# Altium PCB DCDC_4812.PcbDoc
Units mil, origin at the board's own origin, x right, y up, seen from the top; angles counter-clockwise.
Board outline 3000 x 4250 mil, 2 copper layers (Top Layer, Bottom Layer), stack 70.024 mil thick; 46 components, 13 nets, 167 pads, 9 vias.
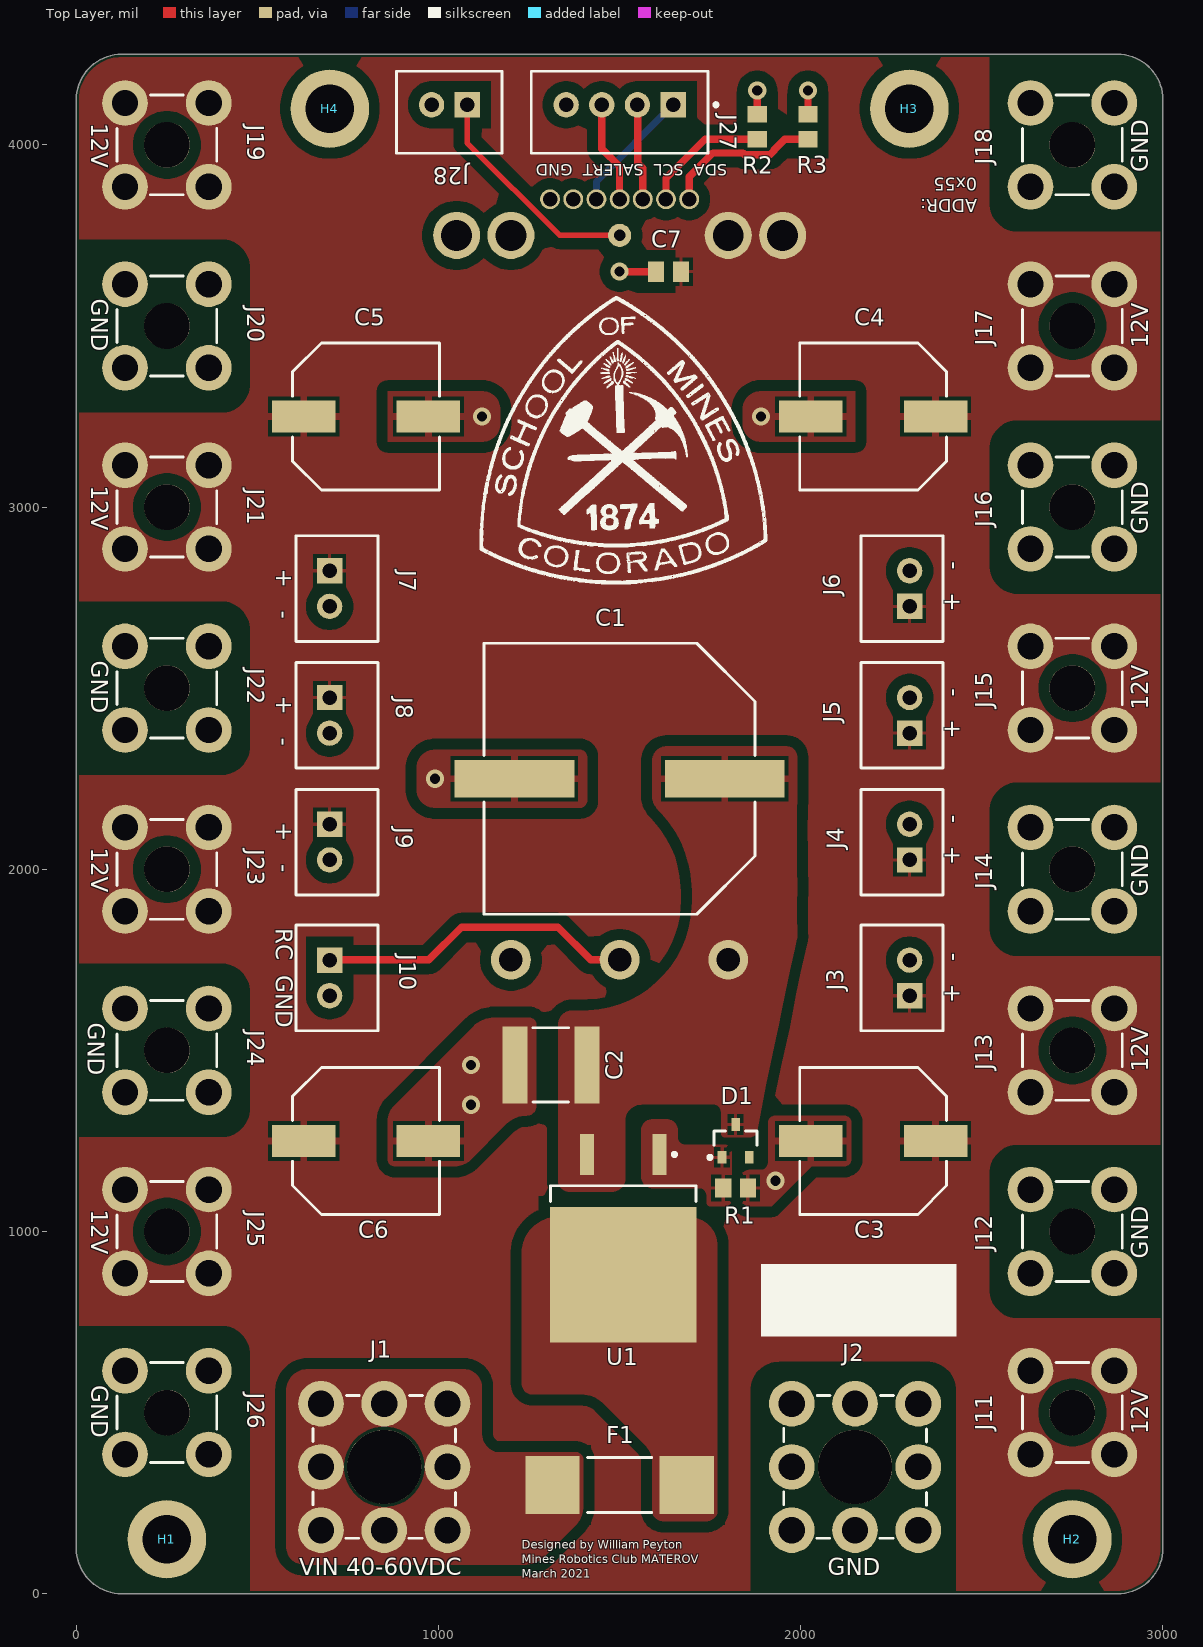
[diagram p0: Top Layer view]
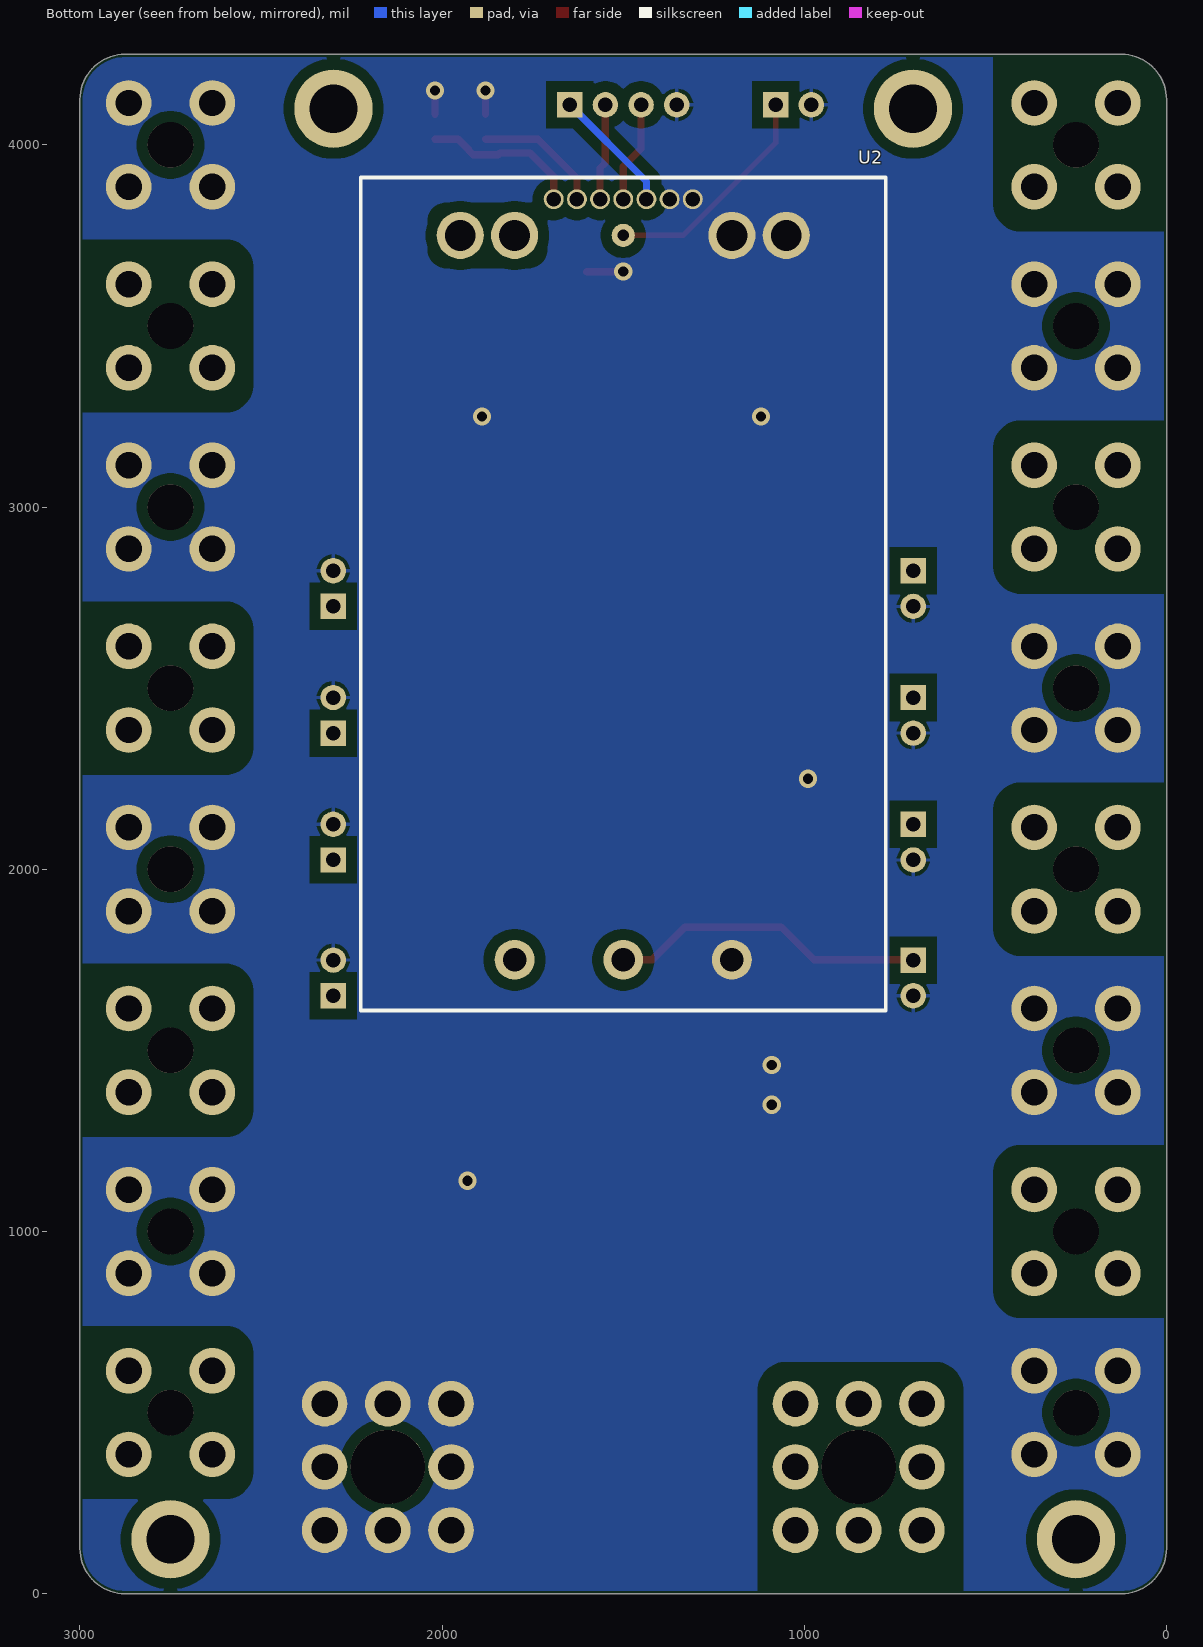
[diagram p1: Bottom Layer view, seen from below]
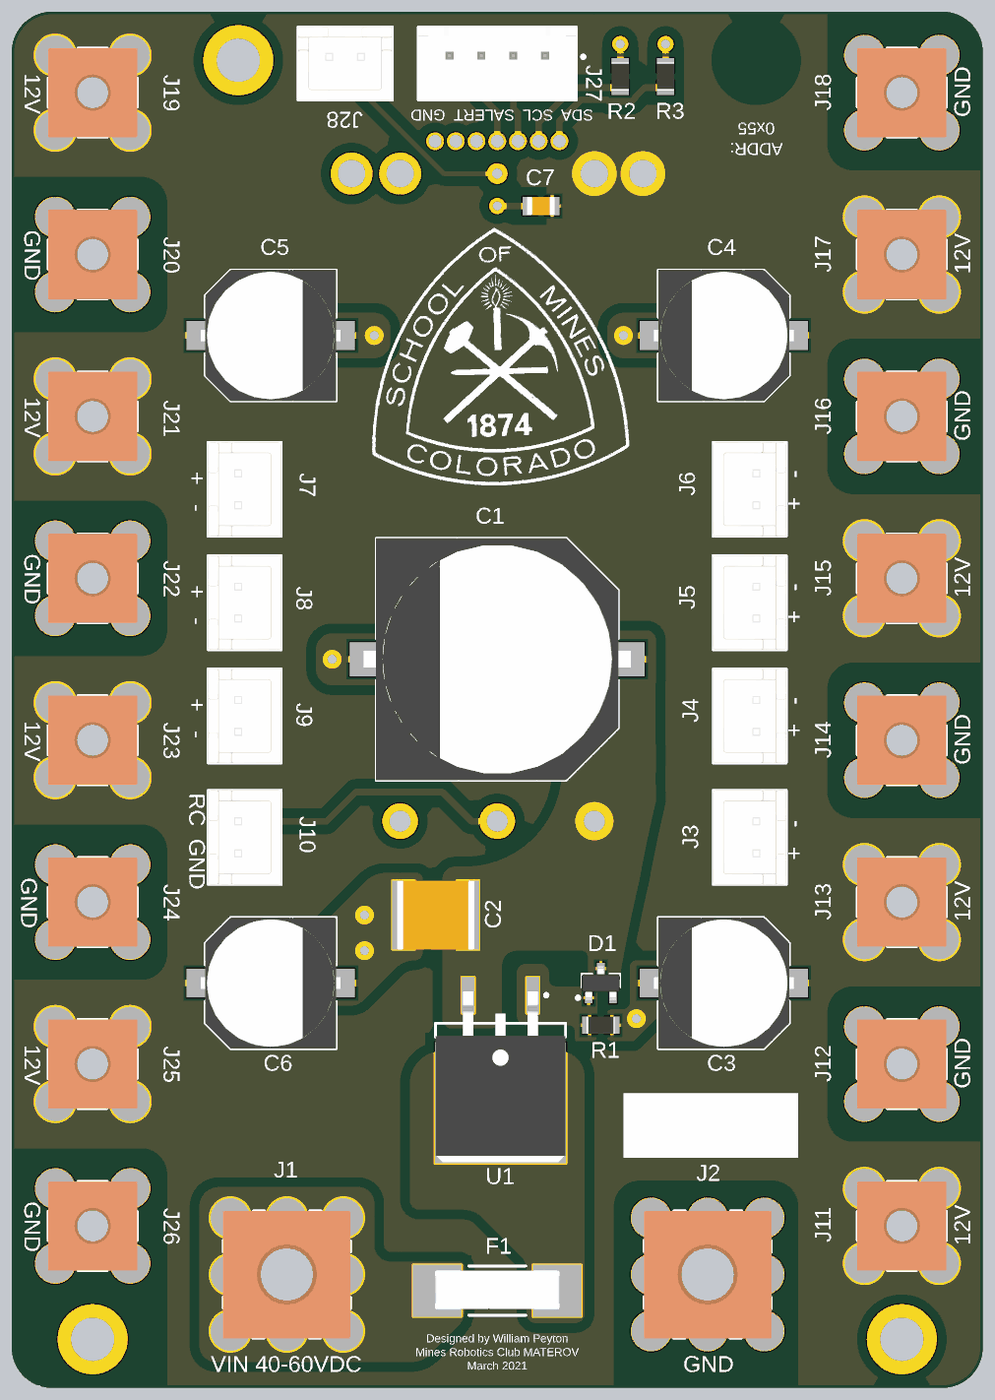
[diagram p2: 3D render of the assembled board from above, using the file's embedded part models]

## Layer stack, top to bottom
Top Solder: solder mask 1, SM-001, Dk 4
Top Layer: signal copper 5.5118
Dielectric 1: core 59, Core-043, Dk 4.3
Bottom Layer: signal copper 5.5118
Bottom Solder: solder mask 1, SM-001, Dk 4

## Board outline
0,125 ccw(c125,125) 125,0 2875,0 ccw(c2875,125) 3000,125 3000,4125 ccw(c2875,4125) 2875,4250 125,4250 ccw(c125,4125) 0,4125

## Design rules (kind name [scope] priority, off if disabled: settings)
BoardOutlineClearance [All] p1: gap=7.87 ignorepadtopadclearanceinfootprint=FALSE except(15.75: Arc-SplitBarrior Arc-SplitContinuation Track-SplitBarrior Track-SplitContinuation SMDPad-SplitBarrior SMDPad-SplitContinuation THPad-SplitBarrior THPad-SplitContinuation Via-SplitBarrior Via-SplitContinuation Fill-SplitBarrior Fill-SplitContinuation Poly-SplitBarrior Poly-SplitContinuation Region-SplitBarrior Region-SplitContinuation Text-SplitBarrior Text-SplitContinuation)
Clearance Clearance_1 [InNamedPolygon('NONET_L-01_P-001') Or InNamedPolygon('NONET_L-01_P-001')] p1: gap=30 ignorepadtopadclearanceinfootprint=FALSE
Clearance "Clearance Bottom Layer" [OnLayer('Bottom Layer')] p2: gap=8 ignorepadtopadclearanceinfootprint=TRUE except(10: Arc-Text Track-Text SMDPad-Text THPad-Text Via-Text Fill-Text Poly-Text Region-Text Text-Text)
Clearance "Clearance Top Layer" [OnLayer('Top Layer')] p3: gap=8 ignorepadtopadclearanceinfootprint=TRUE except(10: Arc-Text Track-Text SMDPad-Text THPad-Text Via-Text Fill-Text Poly-Text Region-Text Text-Text)
Clearance [All] p4: gap=7.87 ignorepadtopadclearanceinfootprint=FALSE except(3.5: Arc-Arc Arc-Track Arc-SMDPad Track-Track Track-SMDPad SMDPad-SMDPad; 5: Arc-Via Track-Via SMDPad-Via THPad-Via Via-Via; 10: Arc-Text Track-Text SMDPad-Text THPad-Text Via-Text Fill-Text Poly-Text Region-Text Text-Text)
HoleSize [All] p1: absolutevalues=TRUE maxlimit=248.03 minlimit=7.87 maxpercent=80.000 minpercent=20.000
MinimumAnnularRing [All] p1: minimumring=3
MinimumSolderMaskSliver [All] p1: minsoldermaskwidth=3.94
PolygonConnect PolygonConnect_32 [All vs HasFootprint('C2220M Generic')] p1: connectstyle=Direct reliefconductorwidth=10 reliefentries=4 polygonreliefangle="90 Angle" airgapwidth=10
PolygonConnect PolygonConnect_31 [All vs HasFootprint('C2220M Generic')] p2: connectstyle=Relief reliefconductorwidth=20 reliefentries=4 polygonreliefangle="90 Angle" airgapwidth=10
PolygonConnect PolygonConnect_30 [All vs HasFootprint('875115357006')] p3: connectstyle=Relief reliefconductorwidth=20 reliefentries=4 polygonreliefangle="90 Angle" airgapwidth=10
PolygonConnect PolygonConnect_29 [HasFootprint('875115357006') vs IsNamedPolygon('NONET_L-01_P-001')] p4: connectstyle=Relief reliefconductorwidth=20 reliefentries=4 polygonreliefangle="90 Angle" airgapwidth=10
PolygonConnect PolygonConnect_28 [All vs HasFootprint('MAL2150_CASE1821')] p5: connectstyle=Relief reliefconductorwidth=20 reliefentries=4 polygonreliefangle="90 Angle" airgapwidth=10
PolygonConnect PolygonConnect_27 [All vs HasFootprint('FP-B2B-XH-A_LF_SN-MFG')] p6: connectstyle=Relief reliefconductorwidth=10 reliefentries=4 polygonreliefangle="90 Angle" airgapwidth=10
PolygonConnect PolygonConnect_26 [All vs HasFootprint('JST_B4B-XH-A_LF_SN_0')] p7: connectstyle=Relief reliefconductorwidth=10 reliefentries=4 polygonreliefangle="90 Angle" airgapwidth=10
PolygonConnect PolygonConnect_25 [All vs HasFootprint('C2220M Generic')] p8: connectstyle=Relief reliefconductorwidth=10 reliefentries=4 polygonreliefangle="90 Angle" airgapwidth=10
PolygonConnect PolygonConnect_24 [All vs HasFootprint('C2012M Generic')] p9: connectstyle=Relief reliefconductorwidth=10 reliefentries=4 polygonreliefangle="90 Angle" airgapwidth=10
PolygonConnect PolygonConnect_23 [All vs HasFootprint('875115357006')] p10: connectstyle=Relief reliefconductorwidth=10 reliefentries=4 polygonreliefangle="90 Angle" airgapwidth=10
PolygonConnect PolygonConnect_22 [All vs HasFootprint('MAL2150_CASE1821')] p11: connectstyle=Relief reliefconductorwidth=10 reliefentries=4 polygonreliefangle="90 Angle" airgapwidth=10
PolygonConnect PolygonConnect_21 [All vs HasFootprint('RMCF0805')] p12: connectstyle=Relief reliefconductorwidth=10 reliefentries=4 polygonreliefangle="90 Angle" airgapwidth=10
PolygonConnect PolygonConnect_20 [All vs HasFootprint('BZX84-C12,235')] p13: connectstyle=Relief reliefconductorwidth=10 reliefentries=4 polygonreliefangle="90 Angle" airgapwidth=10
PolygonConnect PolygonConnect_19 [All] p14: connectstyle=Direct reliefconductorwidth=10 reliefentries=4 polygonreliefangle="90 Angle" airgapwidth=10
PolygonConnect PolygonConnect_18 [All] p15: connectstyle=Direct reliefconductorwidth=10 reliefentries=4 polygonreliefangle="90 Angle" airgapwidth=10
PolygonConnect PolygonConnect_17 [All vs HasFootprint('74655095')] p16: connectstyle=Direct reliefconductorwidth=10 reliefentries=4 polygonreliefangle="90 Angle" airgapwidth=10
PolygonConnect PolygonConnect_16 [All vs HasFootprint('74650073')] p17: connectstyle=Direct reliefconductorwidth=10 reliefentries=4 polygonreliefangle="90 Angle" airgapwidth=10
PolygonConnect PolygonConnect_15 [All vs HasFootprint('0678L9200-02')] p18: connectstyle=Direct reliefconductorwidth=10 reliefentries=4 polygonreliefangle="90 Angle" airgapwidth=10
PolygonConnect PolygonConnect_14 [All vs IsNamedPolygon('NONET_L-01_P-001')] p19: connectstyle=Relief reliefconductorwidth=10 reliefentries=4 polygonreliefangle="90 Angle" airgapwidth=10
PolygonConnect PolygonConnect_13 [All vs IsNamedPolygon('Top_VIN')] p20: connectstyle=Relief reliefconductorwidth=10 reliefentries=4 polygonreliefangle="90 Angle" airgapwidth=10
PolygonConnect PolygonConnect_12 [All vs IsNamedPolygon('Top_GND')] p21: connectstyle=Relief reliefconductorwidth=10 reliefentries=4 polygonreliefangle="90 Angle" airgapwidth=10
PolygonConnect PolygonConnect_11 [All vs IsNamedPolygon('Top_GND')] p22: connectstyle=Relief reliefconductorwidth=10 reliefentries=4 polygonreliefangle="90 Angle" airgapwidth=10
PolygonConnect PolygonConnect_10 [All vs IsNamedPolygon('Top_GND')] p23: connectstyle=Relief reliefconductorwidth=10 reliefentries=4 polygonreliefangle="90 Angle" airgapwidth=10
PolygonConnect PolygonConnect_9 [All vs IsNamedPolygon('Top_GND')] p24: connectstyle=Relief reliefconductorwidth=10 reliefentries=4 polygonreliefangle="90 Angle" airgapwidth=10
PolygonConnect PolygonConnect_8 [All vs IsNamedPolygon('Top_GND')] p25: connectstyle=Relief reliefconductorwidth=10 reliefentries=4 polygonreliefangle="90 Angle" airgapwidth=10
PolygonConnect PolygonConnect_7 [All vs IsNamedPolygon('Top_GND')] p26: connectstyle=Relief reliefconductorwidth=10 reliefentries=4 polygonreliefangle="90 Angle" airgapwidth=10
PolygonConnect PolygonConnect_6 [All vs IsNamedPolygon('Top_FuseOut')] p27: connectstyle=Relief reliefconductorwidth=10 reliefentries=4 polygonreliefangle="90 Angle" airgapwidth=10
PolygonConnect PolygonConnect_5 [All vs IsNamedPolygon('Top_Diode')] p28: connectstyle=Relief reliefconductorwidth=10 reliefentries=4 polygonreliefangle="90 Angle" airgapwidth=10
PolygonConnect PolygonConnect_4 [All vs IsNamedPolygon('Top_48V')] p29: connectstyle=Relief reliefconductorwidth=10 reliefentries=4 polygonreliefangle="90 Angle" airgapwidth=10
PolygonConnect PolygonConnect_3 [All vs IsNamedPolygon('NONET_L-01_P-001')] p30: connectstyle=Relief reliefconductorwidth=10 reliefentries=4 polygonreliefangle="90 Angle" airgapwidth=10
PolygonConnect PolygonConnect_2 [All vs IsNamedPolygon('NONET_L-01_P-001') Or IsNamedPolygon('NONET_L-01_P-001')] p31: connectstyle=Direct reliefconductorwidth=10 reliefentries=4 polygonreliefangle="90 Angle" airgapwidth=10
PolygonConnect [All vs IsNamedPolygon('NONET_L-01_P-001') Or IsNamedPolygon('NONET_L-01_P-001')] p32: connectstyle=Direct reliefconductorwidth=10 reliefentries=4 polygonreliefangle="90 Angle" airgapwidth=10
PolygonConnect PolygonConnect_1 [All] p33: thpad.connectstyle=Relief thpad.reliefconductorwidth=20 thpad.reliefentries=4 thpad.polygonreliefangle="90 Angle" thpad.airgapwidth=10 smdpad.connectstyle=Relief smdpad.reliefconductorwidth=20 smdpad.reliefentries=4 smdpad.polygonreliefangle="90 Angle" smdpad.airgapwidth=10 via.connectstyle=Direct via.reliefconductorwidth=20 via.reliefentries=4 via.polygonreliefangle="90 Angle" via.airgapwidth=10
RoutingCorners [All] p1: cornerstyle=Round minsetback=100 maxsetback=100
RoutingVias [All] p1: holewidth=19.68 width=39.37 viastyle="Through Hole" minholewidth=7.87 minwidth=17.72 maxholewidth=39.37 maxwidth=78.74
SilkToSilkClearance [All] p1: silktosilkclearance=3.94
SilkToSolderMaskClearance [IsPad] p1: minsilkscreentomaskgap=3.94 clearancetoexposedcopper=TRUE
SolderMaskExpansion [All] p1: expansion=4 istentingtop=FALSE
Width [All] p1: maxlimit=100 minlimit=3.5 preferedwidth=15
25 further rules are at their usual default settings.

## Components (designator, comment, footprint, x,y, rotation, side; value= is the part's Value field where it differs from the comment)
C1 "470uF 100V" MAL2150_CASE1821 1500,2250 r180 top
C2 "15uF 100V" "C2220M Generic" 1310,1460 r180 top
C3 "470uF 16V" 875115357006 2200,1250 r180 top
C4 "470uF 16V" 875115357006 2200,3250 r180 top
C5 "470uF 16V" 875115357006 800,3250 r0 top
C6 "470uF 16V" 875115357006 800,1250 r0 top
C7 "15uF 35V" "C2012M Generic" 1635,3650 r0 top
D1 "12V 250mW" BZX84-C12,235 1820,1250 r90 top
F1 "72VDC 20A" 0678L9200-02 1500,300 r0 top
H1 "M3" M3_MOUNTING_HOLE#1 590,500 r0 top
H2 "M3" M3_MOUNTING_HOLE#2 2405,500 r0 top
H3 "M3" M3_MOUNTING_HOLE#3 3720,450 r0 top
H4 "M3" M3_MOUNTING_HOLE#4 700,4100 r0 top
J1 "M5x3.5mm" 74655095 850,350 r0 top
J2 "M5x3.5mm" 74655095 2150,350 r0 top
J3 "JST-XH 2POS VERT" FP-B2B-XH-A_LF_SN-MFG 2280,1700 r90 top
J4 "JST-XH 2POS VERT" FP-B2B-XH-A_LF_SN-MFG 2280,2075 r90 top
J5 "JST-XH 2POS VERT" FP-B2B-XH-A_LF_SN-MFG 2280,2425 r90 top
J6 "JST-XH 2POS VERT" FP-B2B-XH-A_LF_SN-MFG 2280,2775 r90 top
J7 "JST-XH 2POS VERT" FP-B2B-XH-A_LF_SN-MFG 720,2775 r270 top
J8 "JST-XH 2POS VERT" FP-B2B-XH-A_LF_SN-MFG 720,2425 r270 top
J9 "JST-XH 2POS VERT" FP-B2B-XH-A_LF_SN-MFG 720,2075 r270 top
J10 "JST-XH 2POS VERT" FP-B2B-XH-A_LF_SN-MFG 720,1700 r270 top
J11 "M3x2.5mm" 74650073 2750,500 r0 top
J12 "M3x2.5mm" 74650073 2750,1000 r0 top
J13 "M3x2.5mm" 74650073 2750,1500 r0 top
J14 "M3x2.5mm" 74650073 2750,2000 r0 top
J15 "M3x2.5mm" 74650073 2750,2500 r0 top
J16 "M3x2.5mm" 74650073 2750,3000 r0 top
J17 "M3x2.5mm" 74650073 2750,3500 r0 top
J18 "M3x2.5mm" 74650073 2750,4000 r0 top
J19 "M3x2.5mm" 74650073 250,4000 r0 top
J20 "M3x2.5mm" 74650073 250,3500 r0 top
J21 "M3x2.5mm" 74650073 250,3000 r0 top
J22 "M3x2.5mm" 74650073 250,2500 r0 top
J23 "M3x2.5mm" 74650073 250,2000 r0 top
J24 "M3x2.5mm" 74650073 250,1500 r0 top
J25 "M3x2.5mm" 74650073 250,1000 r0 top
J26 "M3x2.5mm" 74650073 250,500 r0 top
J27 "JST-XH 4POS VERT" JST_B4B-XH-A_LF_SN_0 1500,4090 r180 top
J28 "JST-XH 2POS VERT" FP-B2B-XH-A_LF_SN-MFG 1030,4090 r180 top
R1 "100kΩ" RMCF0805 1820,1120 r180 top
R2 "100kΩ" RMCF0805 1880,4050 r270 top
R3 "100kΩ" RMCF0805 2020,4050 r270 top
U1 "P-CH FET 75V" SMP3003-DL-1E 1510,980.39 r270 top
U2 "48V/12V DC-DC Converter" BMR4800102/002 1500,2750 r90 bottom

## Footprints (in the part's own frame and the unit in brackets; to place one, negate y for a bottom-side part, rotate by r counter-clockwise, add the part's x,y. Pads: shape width x height; smd on the part's side, far side on the other; paste and mask are expansions set on the pad)
0678L9200-02 [mm] "Bel Fuse FUSE BOARD MNT 20A 250VAC 72VDC"
  rect 3.81x4.06 smd: 1(-4.705,0) 2(4.705,0)
  silkscreen extent -2.25,-1.93 2.25,1.93, body extent -4.9,-1.52 4.9,1.66, height 3.05
74650073 [mm] "REDCUBE THR with internal thread, M3x2.5mm, through"
  round 3.2 hole 1.85: 1(-2.935,-2.935) 1(-2.935,2.935) 1(2.935,-2.935) 1(2.935,2.935)
  round 3.2 hole 3.2 unplated: MH1(0,0)
  silkscreen extent -3.5,-3.5 3.5,3.5, body extent -3.5,-3.5 3.5,3.5, height 3
74655095 [mm] "REDCUBE THR with internal thread, M5x3.5mm, through"
  round 3.2 hole 1.85: 1(-4.435,-4.435) 1(-4.435,0) 1(-4.435,4.435) 1(0,-4.435) 1(0,4.435) 1(4.435,-4.435) 1(4.435,0) 1(4.435,4.435)
  round 5.2 hole 5.2 unplated: MH1(0,0)
  silkscreen extent -5,-5 5,5, body extent -5,-5 5,5, height 4
875115357006 [mm] "Wurth CAP ALUM POLY 470UF 20% 16V SMD"
  rect 4.45x2.25 smd: 1(-4.375,0) 2(4.375,0)
  silkscreen extent -5.15,-5.15 5.15,5.15, body extent -5.5,-5.15 5.5,5.15, height 10.5
BMR4800102/002 [mil] "Flex Power DC DC CONVERTER 12V 900W"
  round 110 hole 65: 1(-1000,300) 2(-1000,0) 3(-1000,-300)
  round 130 hole 85: 4(1000,-450) 5(1000,-300) 7(1000,300) 8(1000,450)
  round 64 hole 32: 6(1000,0)
  round 55 hole 40: 9(1100,-192) 10(1100,-128) 11(1100,-64) 12(1100,0) 13(1100,64) 14(1100,128) 15(1100,192)
  silkscreen extent -1140,-725 1160,725, body extent -1140,-725 1160,725, height 570
BZX84-C12,235 [mm] "Nexperia DIODE ZENER 12V 250MW TO236AB"
  rect 0.9x0.6 smd: 1(-1.15,0.95) 2(-1.15,-0.95) 3(1.15,0)
  silkscreen extent -1.27,-1.5 0.7,1.92, body extent -1.3,-1.5 1.3,1.5, height 1.1
"C2012M Generic" [mm] "TDK Chip Ceramic Capacitor 2012M Generic"
  rect 1.15x1.45 smd: 1(-0.875,0) 2(0.875,0)
  body extent -1.1,-0.72 1.1,0.72, height 1.45
"C2220M Generic" [mm] "TDK Chip Ceramic Cap 2220M Generic"
  rect 1.75x5.4 smd: 1(-2.525,0) 2(2.525,0)
  silkscreen extent -1.25,-2.6 1.25,2.6, body extent -3.05,-2.7 3.05,2.7, height 2.8
FP-B2B-XH-A_LF_SN-MFG [mil]
  rect 70x70 hole 40 paste-39370.1 mask+0: 1(-49.21,-20.67)
  round 70 hole 40 paste-39370.1 mask+0: 2(49.21,-20.67)
  silkscreen extent -146,-113 146,113, body extent -150,-117 150,117, height 10
JST_B4B-XH-A_LF_SN_0 [mil]
  rect 70x70 hole 40 paste-39370.1 mask+0: 1(-147.64,-20.67)
  round 70 hole 40 paste-39370.1 mask+0: 2(-49.21,-20.67) 3(49.21,-20.67) 4(147.64,-20.67)
  silkscreen extent -271,-113 244,113, body extent -244,-117 244,109, height 276
M3_MOUNTING_HOLE#1 [mm] "MECHANICAL M3 MOUNTING HOLE"
  round 5.5 hole 3.4: 1(-8.636,-8.89)
M3_MOUNTING_HOLE#2 [mm] "MECHANICAL M3 MOUNTING HOLE"
  round 5.5 hole 3.4: 1(8.763,-8.89)
M3_MOUNTING_HOLE#3 [mm] "MECHANICAL M3 MOUNTING HOLE"
  round 5.5 hole 3.4: 1(-36.068,92.71)
M3_MOUNTING_HOLE#4 [mm] "MECHANICAL M3 MOUNTING HOLE"
  round 5.5 hole 3.4: 1(0,0)
MAL2150_CASE1821 [mm] "Vishay Aluminum Capacitor MAL2150 Case Code 1821"
  rect 8.4x2.65 smd: 1(-7.375,0) 2(7.375,0)
  silkscreen extent -9.5,-9.5 9.5,9.5, body extent -10.5,-9.5 10.5,9.5, height 22
RMCF0805 [mm] "Stackpole RMCF0805 Family"
  rect 1.15x1.35 smd: 1(-0.875,0) 2(0.875,0)
  body extent -1.1,-0.67 1.1,0.67, height 0.65
SMP3003-DL-1E [mm] "ON Semi MOSFET P-CH 75V 100A D2PAK"
  rect 2.85x1 smd: 1(-5.9,2.54) 3(-5.9,-2.54)
  rect 9.5x10.3 smd: 4(2.55,0)
  silkscreen extent -6.02,-5.1 -2.6,5.1, body extent -6.2,-5.1 7.2,5.1, height 4.95

## Part data
C1: library part MAL215099913E3, "Vishay CAP ALUM 470UF 20% 100V SMD", Manufacturer=Vishay, ComponentLink1Description=DigiKey, ComponentLink1URL=https://www.digikey.com/en/products/detail/vishay-beyschlag-draloric-bc-components/MAL215099913E3/5414592, Part Number=MAL215099913E3
C2: library part C5750X7S2A156M250KB, "TDK CAP CER 15UF 100V X7S 2220", Manufacturer="TDK Corporation", ComponentLink1Description=DigiKey, ComponentLink1URL=https://www.digikey.com/en/products/detail/tdk-corporation/C5750X7S2A156M250KB/2443522, Part Number=C5750X7S2A156M250KB
C3 C4 C5 C6: library part 875115357006, "Wurth CAP ALUM POLY 470UF 20% 16V SMD", Manufacturer="Würth Elektronik", Part Number="CAP ALUM POLY 470UF 20% 16V SMD", ComponentLink1Description=DigiKey, ComponentLink1URL=https://www.digikey.com/en/products/detail/w%C3%BCrth-elektronik/875115357006/5147625?s=N4IgTCBcDaIBwHYCsBGFSDMSEAYcDYQBdAXyA
C7: library part C2012X5R1V156M125AC, "TDK CAP CER 15UF 35V X5R 0805", Manufacturer="TDK Corporation", ComponentLink1Description="New link", Part Number=C2012X5R1V156M125AC
D1: library part BZX84-C12,235, "Nexperia DIODE ZENER 12V 250MW TO236AB", Manufacturer=Nexperia, ComponentLink1Description=DigiKey, ComponentLink1URL=https://www.digikey.com/en/products/detail/nexperia-usa-inc/BZX84-C12-235/5221767, Part Number=BZX84-C12,235
F1: library part 0678L9200-02, "Bel Fuse FUSE BOARD MNT 20A 250VAC 72VDC", Manufacturer="Bel Fuse", ComponentLink1Description=DigiKey, ComponentLink1URL=https://www.digikey.com/en/products/detail/bel-fuse-inc/0678L9200-02/6139782, Part Number=0678L9200-02
H1 H2 H3 H4: library part M3_Mounting_Hole, "MECHANICAL M3 Mounting Hole"
J1 J2: library part 74655095R, "Wurth WP-THRBU REDCUBE THR internal through-hole thread, 10x10mm, M5x3.5mm, 8 pins, 85A", Manufacturer="Wurth Elektronik", Operating Temperature="-55 to +150degC", Rated Current=85A, ComponentLink1Description=Manufacturer, ComponentLink1URL=http://www.we-online.de, ComponentLink2Description=Datasheet, ComponentLink2URL=https://katalog.we-online.com/em/datasheet/74655095R.pdf, Height=4mm, Material=Brass, Mounting Technology=SMT, Packaging="Tape and Reel", Part Number=74655095R, Pin Number=8, Published Date="September 2019", Publisher="Wurth Elektronik", Size=10x10mm, Surface=Tin, Thread=M5, Thread Length=3.5mm
J3 J4 J5 J6 J7 J8 J9 J10 J28: library part B2B-XH-A(LF)(SN), "JST XH CONN HEADER VERT 2POS 2.5MM", Manufacturer=JST, ComponentLink2Description=Datasheet, ComponentLink2URL=http://www.jst-mfg.com/product/pdf/eng/eXH.pdf?5d9b3ba19c79b, Part Number=B2B-XH-A(LF)(SN)
J11 J12 J13 J14 J15 J16 J17 J18 J19 J20 J21 J22 J23 J24 J25 J26: library part 74650073R, "Wurth WP-THRBU REDCUBE THR internal through-hole thread, 7x7mm, M3x2.5mm, 4 pins, 50A", Manufacturer="Wurth Elektronik", Operating Temperature="-55 to +150degC", Rated Current=50A, ComponentLink1Description=Manufacturer, ComponentLink1URL=http://www.we-online.de, ComponentLink2Description=Datasheet, ComponentLink2URL=https://katalog.we-online.com/em/datasheet/74650073R.pdf, Height=3mm, Material=Brass, Mounting Technology=SMT, Packaging="Tape and Reel", Part Number=74650073R, Pin Number=4, Published Date="September 2019", Publisher="Wurth Elektronik", Size=7x7mm, Surface=Tin, Thread=M3, Thread Length=2.5mm
J27: library part B4B-XH-A(LF)(SN), "JST XH CONN HEADER VERT 4POS 2.5MM", Manufacturer=JST, ComponentLink1Description=Upverter, ComponentLink1URL=https://upverter.com/upn/revision/ec0bbf06de5e0de7/, ComponentLink2Description=Datasheet, ComponentLink2URL=http://www.jst-mfg.com/product/pdf/eng/eXH.pdf, Part Number=B4B-XH-A(LF)(SN)
R1 R2 R3: library part RMCF0805FT100K, "Stackpole RES 100K OHM 1% 1/8W 0805", Manufacturer="Stackpole Electronics Inc", Part Number=RMCF0805FT100K
U1: library part SMP3003-DL-1E, "ON Semi MOSFET P-CH 75V 100A D2PAK", Manufacturer="ON Semiconductor", ComponentLink1Description=DigiKey, ComponentLink1URL=https://www.digikey.com/en/products/detail/on-semiconductor/SMP3003-DL-1E/4849083, Part Number=SMP3003-DL-1E
U2: library part BMR4800102/002, "Flex Power DC DC CONVERTER 12V 900W", Manufacturer="Flex Power Modules", ComponentLink1Description=DigiKey, ComponentLink1URL=https://www.digikey.com/en/products/detail/flex-power-modules/BMR4800102-002/10287640?s=N4IgjCBcoExgHAdiqAxlAZgQwDYGcBTAGhAHsoBtEATgAZaB1EAXRIAcAXKEAVQDsAlhwDyGALIEseAK4AnAiAC%2ByoA, Part Number=BMR4800102/002

## Via types
v1: diameter 50, hole 28, Top Layer to Bottom Layer, 9 vias

## Nets (pads, with @x,y where several pads share a name; then routed paths per layer and width w, separated by ;. In a path a pad name is that pad's centre, name@x,y a point inside that pad or via, vN(x,y) a via of type N, cw(c..) or ccw(c..) an arc to the next point about the centre after c; other vN are vias at no path point)
12V: C3.1 C4.1 C5.1 C6.1 C7.2 J3.1 J4.1 J5.1 J6.1 J7.1 J8.1 J9.1 J11.1 J13.1 J15.1 J17.1 J19.1 J21.1 J23.1 J25.1 U2.7 U2.8
48V: F1.1 J1.1
GND: C1.2 C2.2 C3.2 C4.2 C5.2 C6.2 C7.1 J2.1 J3.2 J4.2 J5.2 J6.2 J7.2 J8.2 J9.2 J10.2 J12.1 J14.1 J16.1 J18.1 J20.1 J22.1 J24.1 J26.1 J27.4 J28.2 R1.1 R2.1 R3.1 U2.3 U2.4 U2.5 U2.9 U2.10 | length 231.7
  Top Layer w20: v1(1500,3650) C7.1 ; R2.1 v1(1880,4150) ; R3.1 v1(2020,4150)
  other v1: 1930,1140 1090,1350 1090,1460 990,2250 1120,3250 1890,3250
NetD1_1: D1.1 R1.2 U1.1
NetF1_2: F1.2 U1.4
PG: J28.1 U2.6 | length 631.6
  Top Layer w15: J28.1 1079.21,4005.79 1335,3750 U2.6
RC: J10.1 U2.2 | length 875.6
  Top Layer w10: J10.1 J10.1@700.12,1750
  Top Layer w20: J10.1@700.12,1750 973.15,1750 1063.15,1840 1330,1840 1420,1750 U2.2
SA0: R3.2 U2.15 | length 438.2
  Top Layer w20: U2.15 1692,3912 1757.91,3977.91 1840.14,3977.91 1845.14,3972.91 1914.86,3972.91 1926.57,3984.63 1926.57,3986.57 1955.55,4015.55 R3.2
SA1: R2.2 U2.14 | length 354.5
  Top Layer w20: U2.14 1628,3908 1735.55,4015.55 R2.2
SALERT: J27.3 U2.12 | length 281.1
  Top Layer w20: J27.3 1450.79,3989.21 1500,3940 U2.12
SCL: J27.2 U2.13 | length 266.8
  Top Layer w10: J27.2 J27.2@1550,4109.88
  Top Layer w20: J27.2@1550,4109.88 1550,3950 1564,3936 U2.13
SDA: J27.1 U2.11 | length 348.3
  Bottom Layer w20: U2.11 1436,3899.03 J27.1
VIN: C1.1 C2.1 D1.3 U1.3 U2.1
pads on no net: D1.2 H1.1 H2.1 H3.1 H4.1 J1.MH1 J2.MH1 J11.MH1 J12.MH1 J13.MH1 J14.MH1 J15.MH1 J16.MH1 J17.MH1 J18.MH1 J19.MH1 J20.MH1 J21.MH1 J22.MH1 J23.MH1 J24.MH1 J25.MH1 J26.MH1

## Polygon pours and split planes (outlines as drawn)
VIN on Top Layer "Top_VIN" (solid, pour order 7): 1990,2193.27 1990,2310 ccw(c1960.72,2310) 1960.71,2339.29 1629.29,2339.29 ccw(c1629.28,2300.01) 1590,2300 1590,2204.14 ccw(c1647.92,2204.14) 1606.97,2163.18 cw(c1382.44,1938.62) 1700,1938.59 1700,1909.82 cw(c1399.59,1910.31) 1399.58,1609.9 1369.9,1609.9 ccw(c1369.89,1570.26) 1330.25,1570.25 1330.25,1139.75 ccw(c1360.1,1139.74) 1360.1,1109.9 1479.66,1109.9 ccw(c1479.66,1145.24) 1515,1145.24 1515,1305 cw(c1559.9,1305) 1559.9,1349.9 1760.1,1349.89 cw(c1760.11,1329.76) 1780.25,1329.75 1780.25,1269.75 ccw(c1790.1,1269.74) 1790.1,1259.9 1859.9,1259.9 ccw(c1859.9,1280.25) 1880.15,1278.25 cw(c6855.06,410.73) 1940,1570.25 cw(c6024.62,843.48) 1990,1810 cw(c6675.91,1880) 1990.21,1963.1 cw(c5714.17,2081.7)
12V on Top Layer "NONET_L-01_P-001" (solid, pour order 19): 0,4125 0,125 ccw(c125,125) 125,0 2875,0 ccw(c2875,125) 3000,125 3000,4125 ccw(c2875,4125) 2875,4250 125,4250 ccw(c125,4125)
48V on Top Layer "Top_48V" (solid, pour order 1): 640,620 1070,620 cw(c1070,570) 1120,570 1120,440 ccw(c1170,440) 1170,390 1380,390 cw(c1380,370) 1400,370 1400,244.14 cw(c1317.57,244.14) 1375.86,185.86 1294.14,104.14 cw(c1235.86,162.42) 1235.86,80 630,80 cw(c630,130) 580,130 580,560 cw(c640,560)
NetF1_2 on Top Layer "Top_FuseOut" (solid, pour order 0): 1230,940 1230,580 ccw(c1260,580) 1260,550 1395.86,550 cw(c1395.86,467.58) 1454.14,525.86 1572.93,407.07 cw(c1531.73,365.87) 1590,365.86 1590,230 ccw(c1620,230) 1620,200 1740,200 ccw(c1740,230) 1770,230 1770,960 ccw(c1690,960) 1690,1040 1330,1040 ccw(c1330,940)
NetD1_1 on Top Layer "Top_Diode" (solid, pour order 4): 1560,1280 1560,1150 ccw(c1590,1150) 1590,1120 1720,1120 cw(c1720,1100.01) 1740,1100 1740,1080 ccw(c1750,1080) 1750,1070 1790,1070 ccw(c1790,1090) 1810,1090 1810,1220 ccw(c1790,1220) 1790,1240 1680,1240 cw(c1680,1260) 1660,1260 1660,1280 ccw(c1630,1280) 1630,1310 1590,1310 ccw(c1590,1280)
GND on Top Layer "Top_GND" (solid, pour order 12): 2150,3180 2150,3320 1890,3320 ccw(c1890,3270) 1840,3270 1840,3230 ccw(c1890,3230) 1890,3180
GND on Top Layer "Top_GND" (solid, pour order 11): 860,3320 860,3180 1120,3180 ccw(c1120,3230) 1170,3230 1170,3270 ccw(c1120,3270) 1120,3320
GND on Top Layer "Top_GND" (solid, pour order 10): 1410,2310 1410,2190 cw(c1390,2190) 1390,2170 990,2170 cw(c990,2220) 940,2220 940,2280 cw(c990,2280) 990,2330 1390,2330 cw(c1390,2310)
GND on Top Layer "Top_GND" (solid, pour order 8): 1270,1570 1270,1345.86 cw(c1244.15,1345.86) 1244.14,1320 ccw(c1244.14,1237.59) 1185.86,1295.86 1087.07,1197.07 cw(c1045.86,1238.27) 1045.86,1180 880,1180 cw(c880,1200) 860,1200 860,1305.86 cw(c918.28,1305.86) 877.07,1347.07 1095.86,1565.86 cw(c1154.14,1507.58) 1154.14,1590 1250,1590 cw(c1250,1570)
GND on Top Layer "Top_GND" (solid, pour order 9): 2120,1320 1930,1320 ccw(c1930,1300) 1910,1300 1910,1190 cw(c1890,1190) 1890,1170 1860,1170 ccw(c1860,1140) 1830,1140 1830,1100 ccw(c1860,1100) 1860,1070 1920,1070 2030,1180 2120,1180 ccw(c2120,1200) 2140,1200 2140,1300 ccw(c2120,1300)
GND on Bottom Layer "NONET_L-01_P-001" (solid, pour order 16): 125,0 2875,0 ccw(c2875,125) 3000,125 3000,4125 ccw(c2875,4125) 2875,4250 125,4250 ccw(c125,4125) 0,4125 0,125 ccw(c125,125)

## Other copper
Top Layer:
  pour cut-out: 3010,4250 2520,4250 2520,3840 ccw(c2600,3840) 2600,3760 3010,3760
  pour cut-out: 1940,640 2350,640 cw(c2350,560) 2430,560 2430,0 1860,0 1860,560 cw(c1940,560)
  pour cut-out: 0,0 480,0 480,660 ccw(c400,660) 400,740 0,740
  pour cut-out: 0,1260 400,1260 ccw(c400,1340) 480,1340 480,1660 ccw(c400,1660) 400,1740 0,1740
  pour cut-out: 0,2260 400,2260 ccw(c400,2340) 480,2340 480,2660 ccw(c400,2660) 400,2740 0,2740
  pour cut-out: 0,3260 400,3260 ccw(c400,3340) 480,3340 480,3660 ccw(c400,3660) 400,3740 0,3740
  pour cut-out: 3000,3240 2600,3240 ccw(c2600,3160) 2520,3160 2520,2840 ccw(c2600,2840) 2600,2760 3000,2760
  pour cut-out: 3000,2240 2600,2240 ccw(c2600,2160) 2520,2160 2520,1840 ccw(c2600,1840) 2600,1760 3000,1760
  pour cut-out: 3000,1240 2600,1240 ccw(c2600,1160) 2520,1160 2520,840 ccw(c2600,840) 2600,760 3000,760
Bottom Layer:
  pour cut-out: 1760,3840 1990,3840 cw(c1990,3790) 2040,3790 2040,3710 cw(c1990,3710) 1990,3660 1760,3660 cw(c1760,3710) 1710,3710 1710,3790 cw(c1760,3790)
  pour cut-out: 0,760 400,760 ccw(c400,840) 480,840 480,1160 ccw(c400,1160) 400,1240 0,1240
  pour cut-out: 0,1760 400,1760 ccw(c400,1840) 480,1840 480,2160 ccw(c400,2160) 400,2240 0,2240
  pour cut-out: 0,2760 400,2760 ccw(c400,2840) 480,2840 480,3160 ccw(c400,3160) 400,3240 0,3240
  pour cut-out: 0,3760 400,3760 ccw(c400,3840) 480,3840 480,4250 0,4250
  pour cut-out: 3000,3740 2600,3740 ccw(c2600,3660) 2520,3660 2520,3340 ccw(c2600,3340) 2600,3260 3000,3260
  pour cut-out: 3000,2740 2600,2740 ccw(c2600,2660) 2520,2660 2520,2340 ccw(c2600,2340) 2600,2260 3000,2260
  pour cut-out: 3000,1740 2600,1740 ccw(c2600,1660) 2520,1660 2520,1340 ccw(c2600,1340) 2600,1260 3000,1260
  pour cut-out: 3000,740 2600,740 ccw(c2600,660) 2520,660 2520,340 ccw(c2600,340) 2600,260 3000,260
  pour cut-out: 640,640 1050,640 cw(c1050,560) 1130,560 1130,0 560,0 560,560 cw(c640,560)

## Silkscreen, mask and mechanical layers (free items; w line width, h text height)
Top Overlay:
  drawing of 50 lines, arcs and shapes, not listed
  text "12V" at 24.3,4059.47 h80 r270
  text "SDA  SCL  SALERT  GND" at 1796.87,3957.6 h55 r180
  text "GND" at 2975.64,3924.33 h80 r90
  text "ADDR: / 0x55" at 2487.48,3921.9 h60 r180
  text "GND" at 24.36,3575.67 h80 r270
  text "12V" at 2975.7,3440.53 h80 r90
  text "12V" at 24.3,3059.47 h80 r270
  text "GND" at 2975.64,2924.33 h80 r90
  text "+   -" at 534.8,2829.5 h80 r270
  text "+   -" at 2455.2,2710.5 h80 r90
  text "GND" at 24.36,2575.67 h80 r270
  text "+   -" at 534.8,2479.5 h80 r270
  text "12V" at 2975.7,2440.53 h80 r90
  text "+   -" at 2455.2,2360.5 h80 r90
  text "+   -" at 534.8,2129.5 h80 r270
  text "12V" at 24.3,2059.47 h80 r270
  text "+   -" at 2455.2,2010.5 h80 r90
  text "GND" at 2975.64,1924.33 h80 r90
  text "RC  GND" at 533.58,1836.65 h80 r270
  text "+   -" at 2455.2,1630.5 h80 r90
  text "GND" at 14.36,1575.67 h80 r270
  text "12V" at 2975.7,1440.53 h80 r90
  text "12V" at 24.3,1059.47 h80 r270
  text "GND" at 2975.64,924.33 h80 r90
  text "GND" at 24.36,575.67 h80 r270
  text "12V" at 2975.7,440.53 h80 r90
  text "Designed by William Peyton / Mines Robotics Club MATEROV / March 2021" at 1230,36.02 h40
  text "VIN 40-60VDC" at 615.01,34.36 h80
  text "GND" at 2074.33,34.36 h80
Mechanical 1:
  lines w10: 3000,120 3000,4125 ccw(c2875,4125) 2875,4250 125,4250 ccw(c125,4125) 0,4125 0,125 ccw(c125,125) 125,0 2875,0 ccw(c2875,125) 3000,125